# Altium PCB brushed_motor.PcbDoc
Units mm, origin at the board's own origin, x right, y up, seen from the top; angles counter-clockwise.
Board outline 100 x 100 mm, 2 copper layers (Top Layer, Bottom Layer); 34 components, 17 nets, 90 pads, 42 vias.
Unrouted connection lines stored in the file: 41.
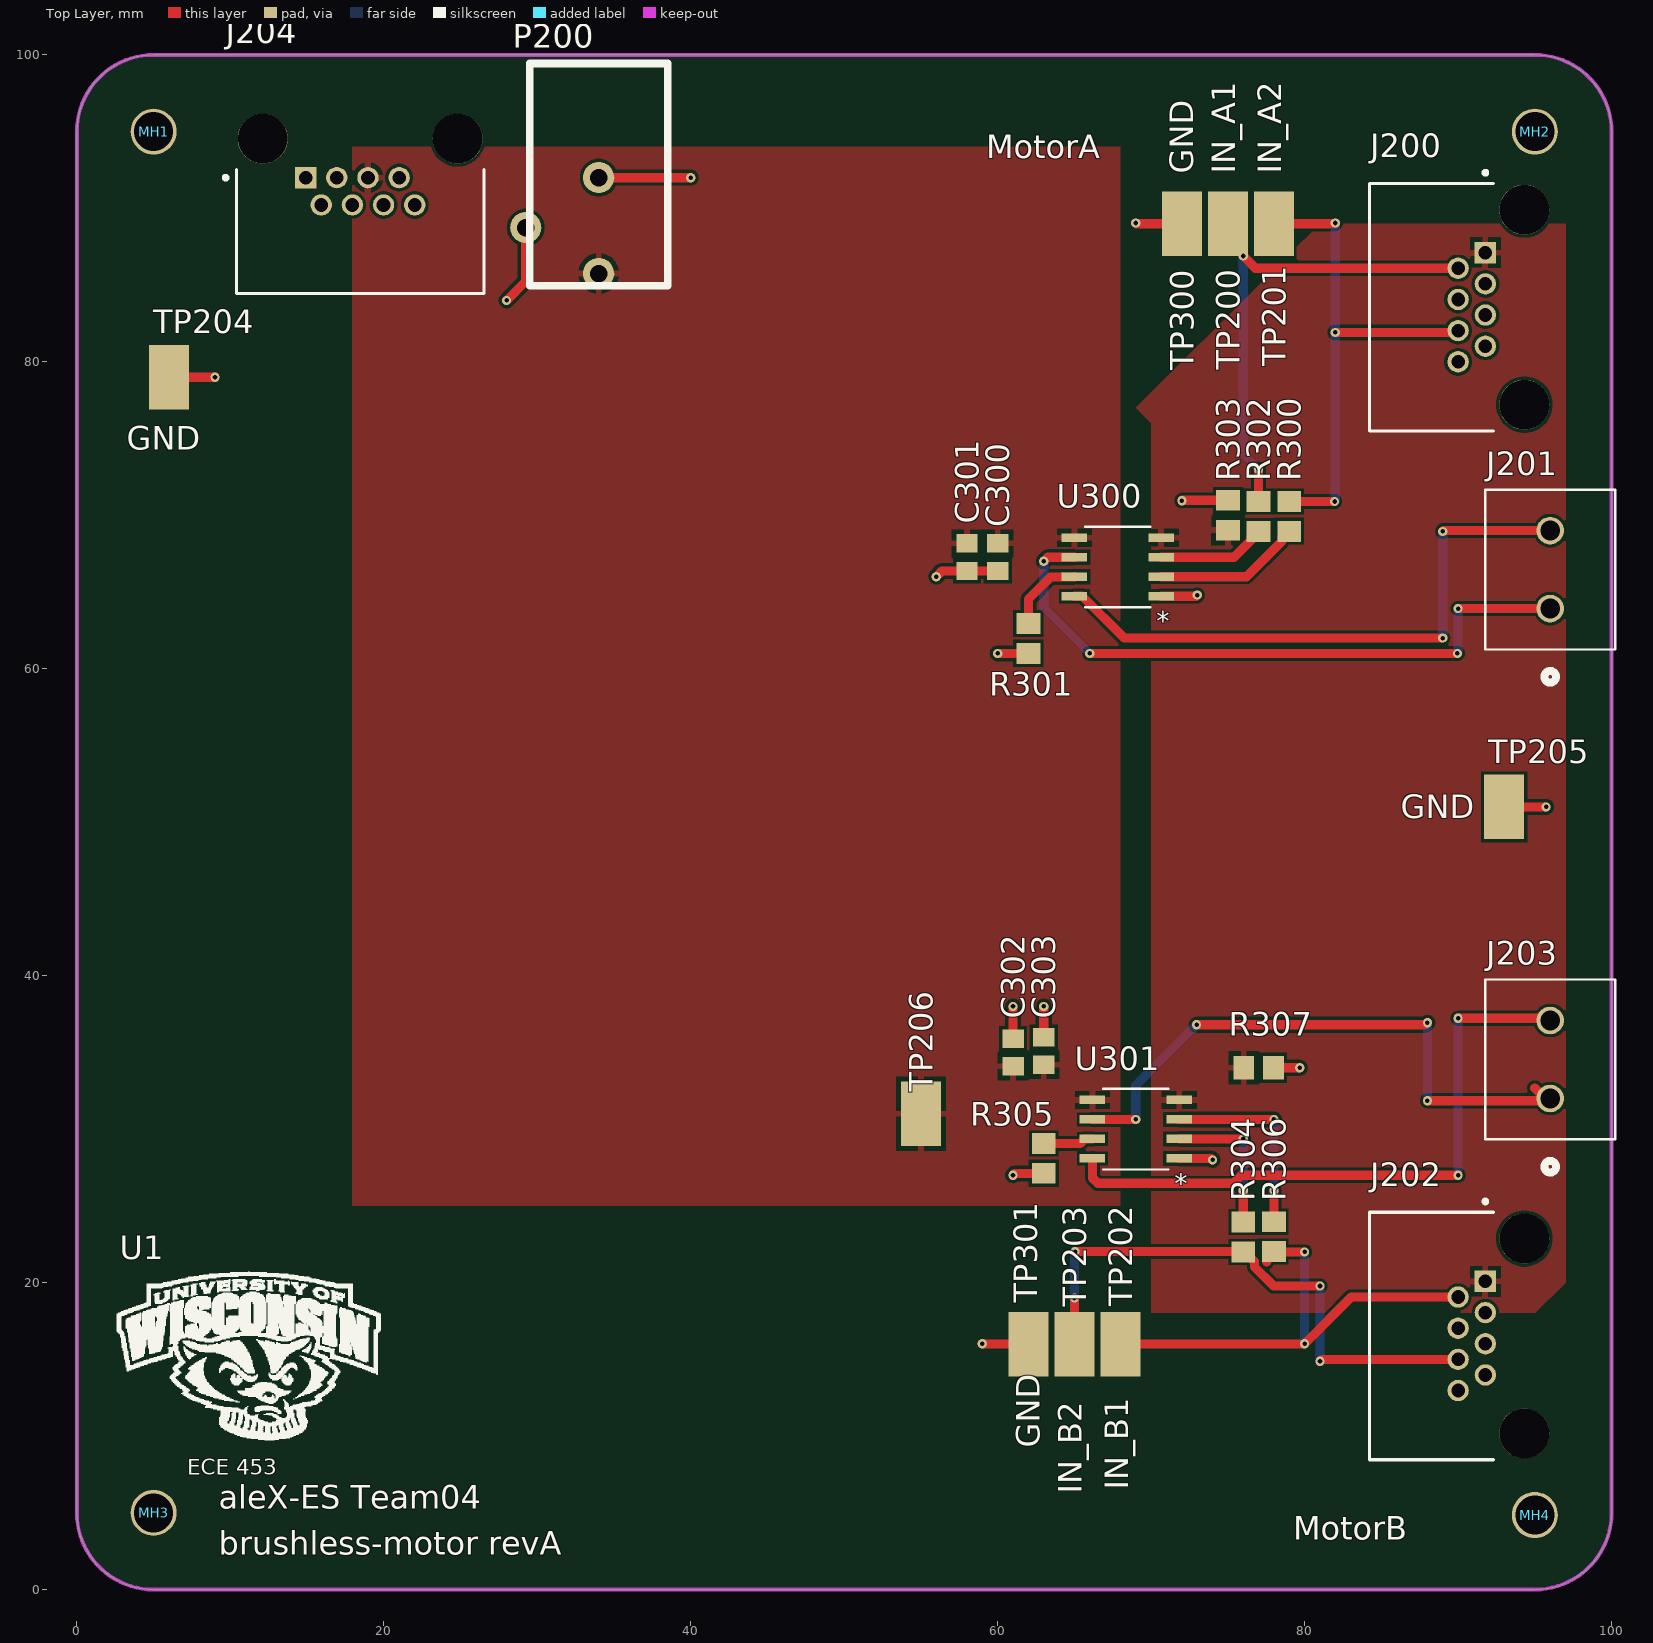
[diagram p0: Top Layer view]
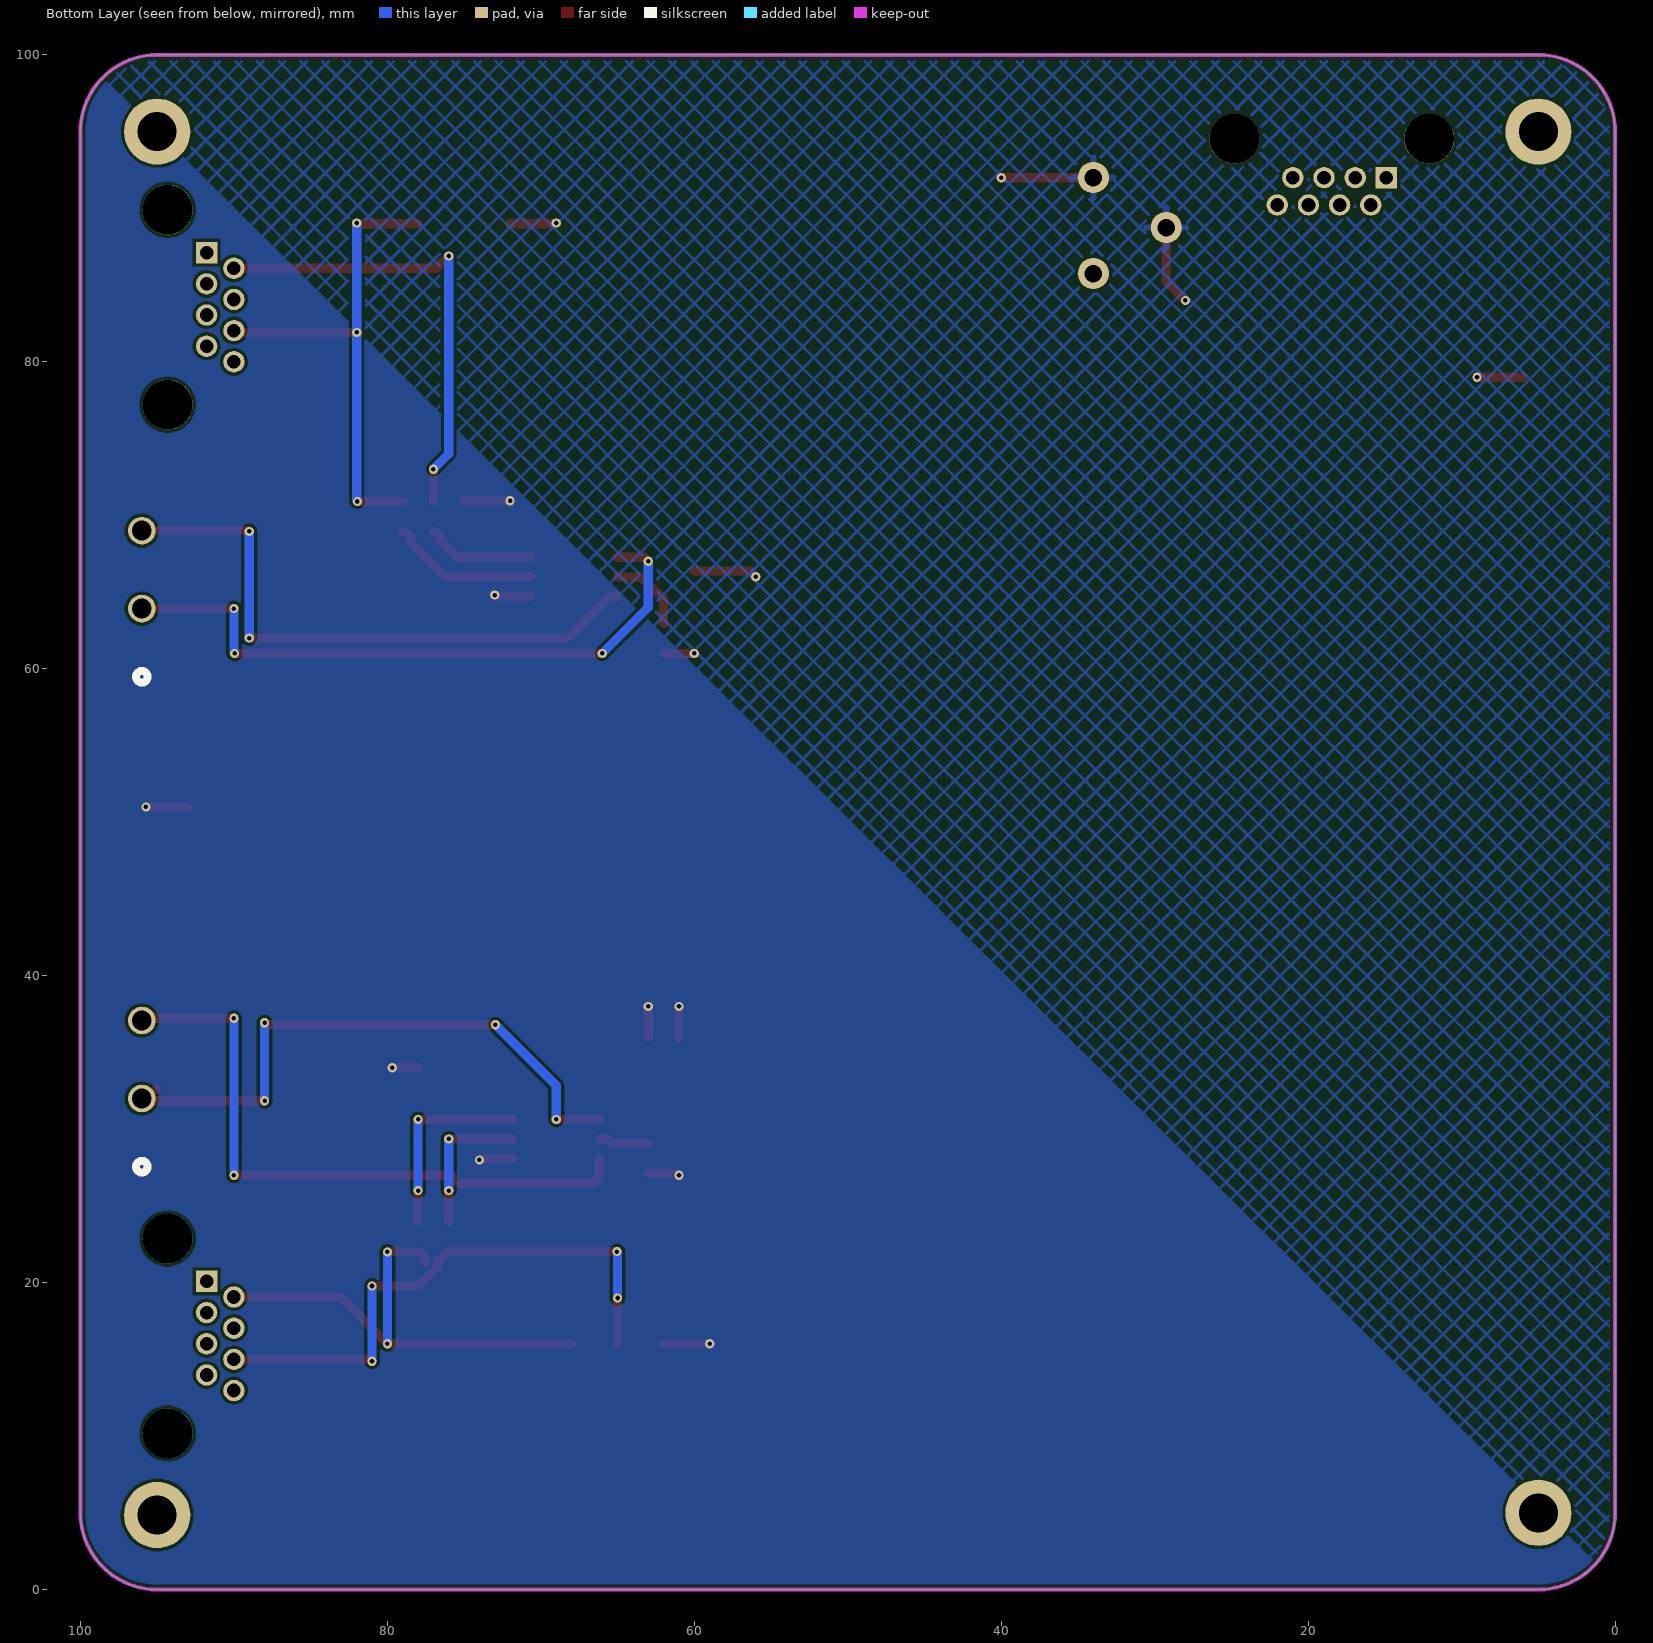
[diagram p1: Bottom Layer view, seen from below]

## Layer stack, top to bottom
Top Solder: solder mask 0.0102, Solder Resist, Dk 3.5
Top Layer: signal copper 0.0356
Dielectric1: dielectric 0.32, FR-4, Dk 4.8
Bottom Layer: signal copper 0.0356
Bottom Solder: solder mask 0.0102, Solder Resist, Dk 3.5

## Board outline
0,5 ccw(c5,5) 5,0 95,0 ccw(c95,5) 100,5 100,95 ccw(c95,95) 95,100 5,100 ccw(c5,95) 0,95

## Design rules (kind name [scope] priority, off if disabled: settings)
Clearance Polygon_Clearance [All vs InPolygon] p1: gap=0.2 ignorepadtopadclearanceinfootprint=FALSE
Clearance [All] p2: gap=0.2 ignorepadtopadclearanceinfootprint=TRUE
ComponentClearance [InComponent('U3')] p1: gap=0 collisioncheckmode=3 verticalgap=0.254 showdistances=FALSE
Height [All] p1: minheight=0 maxheight=75 prefheight=12.7
HoleSize [All] p1: absolutevalues=TRUE maxlimit=6.35 minlimit=0.3 maxpercent=80.000 minpercent=20.000
MinimumAnnularRing [All] p1: minimumring=0.15
MinimumSolderMaskSliver [All] p1: minsoldermaskwidth=0.22
NetAntennae NetAntennae_5.0V [InNet('5.0V')] p1: netantennaetolerance=0
NetAntennae NetAntennae_3.3V [InNet('3.3V')] p2: netantennaetolerance=0
PlaneClearance [All] p1: clearance=0.3
PlaneConnect [All] p1: planeconnectstyle=Relief reliefexpansion=0.3 reliefentries=4 reliefconductorwidth=0.3 reliefairgap=0.3
PolygonConnect ViaConnect [All vs IsVia] p1: connectstyle=Direct reliefconductorwidth=0.381 reliefentries=4 polygonreliefangle="90 Angle" airgapwidth=0.254
PolygonConnect [All] p2: connectstyle=Relief reliefconductorwidth=0.4 reliefentries=4 polygonreliefangle="90 Angle" airgapwidth=0.3
RoutingVias [All] p1: holewidth=0.3 width=0.6 viastyle="Through Hole" minholewidth=0.3 minwidth=0.6 maxholewidth=5 maxwidth=10
SilkToSilkClearance [All] p1: silktosilkclearance=0
SilkToSolderMaskClearance [IsPad] p1: minsilkscreentomaskgap=0 clearancetoexposedcopper=TRUE
SolderMaskExpansion [All] p1: expansion=0.102 istentingtop=FALSE
UnConnectedPin [All] p1:
Width [All] p1: maxlimit=10 minlimit=0.2 preferedwidth=0.6
21 further rules are at their usual default settings.

## Classes and differential pairs
component class 04_Mechanical: MH1 MH2 MH3 MH4 U1

## Components (designator, comment, footprint, x,y, rotation, side; value= is the part's Value field where it differs from the comment)
C300 "C0805C104K5RACTU" CAP_0805 60,67.27 r270 top value=100nF
C301 "C0805C106K8PACTU" CAP_0805 58,67.27 r270 top value=10uF
C302 "C0805C104K5RACTU" CAP_0805 61,35 r90 top value=100nF
C303 "C0805C106K8PACTU" CAP_0805 63,35.1 r90 top value=10uF
J200 "RJHSE-5080" FP-RJHSE-5080-MFG 91.905,83.556 r90 top
J201 "TB006-508-02BE" CONN_TB006-508-02_CUD 96,63.92 r90 top
J202 "RJHSE-5080" FP-RJHSE-5080-MFG 91.905,16.524 r90 top
J203 "TB006-508-02BE" CONN_TB006-508-02_CUD 96,32 r90 top
J204 "RJHSE-5080" FP-RJHSE-5080-MFG 18.46,92.127 r180 top
MH1 "MHOLE_2_55MM" MHOLE_2_55MM 5,95 r0 top locked
MH2 "MHOLE_2_55MM" MHOLE_2_55MM 95,95 r0 top locked
MH3 "MHOLE_2_55MM" MHOLE_2_55MM 5,5 r0 top locked
MH4 "MHOLE_2_55MM" MHOLE_2_55MM 95,4.858 r0 top locked
P200 "PJ-102" PJ-102 34,85.75 r0 top value=CP-102AD
R300 "10K" RESC2013X70X40ML20T20 79,69.925 r270 top value=1K
R301 "1" RESC2013X70X40ML20T20 62,61.975 r90 top value=0.1
R302 "10K" RESC2013X70X40ML20T20 77,69.925 r270 top value=1K
R303 "10K" RESC2013X70X40ML20T20 75,70 r270 top
R304 "10K" RESC2013X70X40ML20T20 76,22.975 r90 top value=1K
R305 "1" RESC2013X70X40ML20T20 63,28.095 r90 top value=0.1
R306 "10K" RESC2013X70X40ML20T20 78,23 r90 top value=1K
R307 "10K" RESC2013X70X40ML20T20 77,34 r180 top
TP200 "IN_A1" TP-SMC-1206 75,89 r90 top
TP201 "IN_A2" TP-SMC-1206 78,89 r90 top
TP202 "IN_A1" TP-SMC-1206 68,16 r90 top
TP203 "IN_A2" TP-SMC-1206 65,16 r90 top
TP204 "GND" TP-SMC-1206 6,79 r90 top
TP205 "GND" TP-SMC-1206 93,51 r90 top
TP206 "VBrush" TP-SMC-1206 55,31 r90 top
TP300 "GND" TP-SMC-1206 72,89 r90 top
TP301 "GND" TP-SMC-1206 62,16 r90 top
U1 "Bucky" WalkingBucky 10,8 r0 top
U300 "DRV8251DDAR" POWERPAD_DDA_TEX-M 67.826,66.635 r180 top
U301 "DRV8251DDAR" POWERPAD_DDA_TEX-M 69,30 r180 top

## Footprints (in the part's own frame and the unit in brackets; to place one, negate y for a bottom-side part, rotate by r counter-clockwise, add the part's x,y. Pads: shape width x height; smd on the part's side, far side on the other; paste and mask are expansions set on the pad)
CAP_0805 [mm]
  rect 1.2x1.4 smd: 1(-0.9,0) 2(0.9,0)
  body extent -1.07,-0.7 1.07,0.7, height 0.7
CONN_TB006-508-02_CUD [mil]
  round 71 / inner round 60 / far side round 71 hole 51 paste-35.5 mask+0: 1(0,0) 2(200,0)
  silkscreen extent -190,-167 305,166
FP-RJHSE-5080-MFG [mm]
  rect 1.39x1.39 hole 0.89 paste-1000 mask+0: 1(3.556,0.127)
  round 1.39 hole 0.89 paste-1000 mask+0: 2(2.54,1.905) 3(1.524,0.127) 4(0.508,1.905) 5(-0.508,0.127) 6(-1.524,1.905) 7(-2.54,0.127) 8(-3.556,1.905)
  round 3.25 hole 3.25 unplated paste-1000 mask+0: ""(-6.35,-2.413) ""(6.35,-2.413)
  silkscreen extent -8.06,-0.41 8.89,7.68, body extent -8.16,-7.78 8.16,7.78, height 0.25
MHOLE_2_55MM [mm]
  round 3 / inner round 4.572 / far side round 4.318 hole 2.55: 1(0,0)
PJ-102 [mil]
  round 80 hole 45: 1(0,0) 2(0,246.05) 3(-187,118.1)
  silkscreen extent -177,-31 177,539, body extent -190,-20 180,547, height 435
POWERPAD_DDA_TEX-M [mil]
  rect 65.5x22 smd paste+0 mask+0: 1(-111.25,75) 2(-111.25,25) 3(-111.25,-25) 4(-111.25,-75) 5(111.25,-75) 6(111.25,-25) 7(111.25,25) 8(111.25,75)
  silkscreen extent -84,-104 84,104, body extent -122,-99 122,99, height 67
RESC2013X70X40ML20T20 [mm]
  rect 1.35x1.55 smd: 1(-0.975,0) 2(0.975,0)
  body extent -1.1,-0.72 1.1,0.72, height 0.7
TP-SMC-1206 [mm]
  rect 4.2x2.6 smd mask+0: 1(0,0)
  body extent -1.57,-0.79 1.63,0.81, height 1.22
WalkingBucky [mm]
  silkscreen extent -7.42,1.75 9.8,12.73

## Part data
C300 C302: library part CMP-2007-00279-2, "CAP CER 0.1UF 50V X7R 0805", Case Code (Imperial)=0805, Case Code (Metric)=2012, Dielectric=X7R, Manufacturer=KEMET, Max Operating Temperature=125°C, Min Operating Temperature=-55°C, Package Quantity=4000, Supplier Part Number=19C6015, Tolerance=10%, Voltage=500V, Voltage Rating=50V, Case/Package=0805, Category="Ceramic Capacitors", ComponentLink1Description=https://datasheet.ciiva.com/32431/slceramic-chip-condensers-e-32431755.pdf?src-supplier=Distrelec, ComponentLink1URL=https://datasheet.ciiva.com/32431/slceramic-chip-condensers-e-32431755.pdf?src-supplier=Distrelec, ComponentLink2Description=Datasheet, ComponentLink2URL=https://content.kemet.com/datasheets/KEM_C1003_C0G_SMD.pdf, ComponentLink3Description=https://datasheet.ciiva.com/28682/1851736-28682232.pdf?src-supplier=Element14, ComponentLink3URL=https://datasheet.ciiva.com/28682/1851736-28682232.pdf?src-supplier=Element14, Construction=Flat, Depth=1.25mm, Height=0.9mm, Lead Pitch=0.75mm, Length=2mm, Manufacturer Part Number=C0805C104K5RACTU, Mounting Technology="Surface Mount,PCB", Packaging="Tape and Reel", Pins=2, Pricing="1=0.024, 25=0.024, 50=0.024, 100=0.024, 250=0.024, 500=0.024, 1000=0.024 (USD)", Radiation Hardening=No, Reach SVHC Compliant=No, RoHS=Yes, RoHS Compliant=Yes, Series="SMD Comm X7R", Stock=3382390, Supplier=Newark, Termination=SMD/SMT, Voltage Rating (DC)=50V, Width=1.2mm
C301 C303: library part CMP-2007-03243-2, "CAP CER 10UF 10V X5R 0805", Case Code (Imperial)=0805, Case Code (Metric)=2012, Dielectric=X5R, Dielectric Material=Ceramic, Manufacturer=KEMET, Max Operating Temperature=85°C, Min Operating Temperature=-55°C, Package Quantity=1, Supplier Part Number=70K9138, Tolerance=10%, Voltage=10V, Case/Package=0805, Category="Ceramic Capacitors", ComponentLink1Description=https://datasheet.ciiva.com/7842/1732709-7842198.pdf?src-supplier=Element14, ComponentLink1URL=https://datasheet.ciiva.com/7842/1732709-7842198.pdf?src-supplier=Element14, Construction=Flat, Contact Plating=Tin,Matte, Depth=1.25mm, Dissipation Factor=10%, Height=1.25mm, Length=2mm, Manufacturer Part Number=C0805C106K8PACTU, Mounting Technology="Surface Mount", Packaging="Tape and Reel", Pins=2, Pricing="1=0.141, 25=0.141, 50=0.141, 100=0.141, 250=0.141, 500=0.141, 1000=0.141 (USD)", Radiation Hardening=No, Reach SVHC Compliant=No, RoHS=Yes, RoHS Compliant=Yes, Series=C, Stock=186414, Supplier=Newark, Termination=SMD/SMT, Thickness=0.055inch, Voltage Rating=10V, Voltage Rating (DC)=10V, Width=0.049inch
J200 J202 J204: library part CMP-02366-000003-1, "CONN MOD JACK 8P8C R/A UNSHLD", Contact Resistance=20mR, Current Rating=1.5A, Manufacturer=Amphenol, Max Voltage Rating (AC)=125V, Package=CONN_MOD_JACK, Supplier Part Number=28T0105, Temperature="-55°C to +85°C", Temperature Range High=+85°C, Temperature Range Low=-55°C, Automotive=No, Category=Conn, ComponentLink1Description=https://datasheet.ciiva.com/7629/1682821-7629402.pdf?src-supplier=Element14, ComponentLink1URL=https://datasheet.ciiva.com/7629/1682821-7629402.pdf?src-supplier=Element14, ComponentLink2Description=Datasheet, ComponentLink2URL=https://cdn.amphenol-icc.com/media/wysiwyg/files/documentation/datasheet/inputoutput/io-modjack-rjhse.pdf, ComponentLink3Description=https://datasheet.ciiva.com/685/rjhse5080-685586.pdf?src-supplier=Digi-Key, ComponentLink3URL=https://datasheet.ciiva.com/685/rjhse5080-685586.pdf?src-supplier=Digi-Key, ComponentLink4Description=https://datasheet.ciiva.com/1432/1693748-1432448.pdf?src-supplier=Element14, ComponentLink4URL=https://datasheet.ciiva.com/1432/1693748-1432448.pdf?src-supplier=Element14, ComponentLink5Description=https://datasheet.ciiva.com/15171/getdatasheetpartid-643190-15171163.pdf?src-supplier=Verical, ComponentLink5URL=https://datasheet.ciiva.com/15171/getdatasheetpartid-643190-15171163.pdf?src-supplier=Verical, Conn Gender=Female, Conn Orientation="Right Angle", Connector Type=RJ45, Contact Material=Gold,Nickel, Contact Plating=Gold, Depth=14.99mm, Device Class L1=Connectors, Device Class L2="Modular / Ethernet Connectors", Device Class L3=unset, Digikey Description="CONN MOD JACK 8P8C R/A UNSHLD", Footprint Url=https://cdn.amphenol-icc.com/media/wysiwyg/files/drawing/rjhse5080.pdf?__cf_chl_jschl_tk__=e349db0bbbb6188a39347cd5e541b92fa02c9719-1587748343-0-AW7tChdeHzRPLX9gSWj7WrKaXQoY9BsmT9Ek0h-T62M9y3Rs9iypFcOtkzb-6sGYQEjFE-jcoNciDETCOZrh1rYyOesac5SvYLoLwHIsHvF4AKBlx-MXmfZUVk9OTTJLqyQq2qMm0PFRLJpNcK0nrKResqOniRSYixG2sPTmOPraH-ULJFBDL602CHqcI9KKBgTq90Jh1OL2Td4moJ99rFsJRJ1Tk_uoxGe8ublcP_ARu-uLpWcQrBcwOcHDTAwL29DAwVaqcH7ta8Ks7WMlHmVl_pILeEDwT0bE9vu5Pa5S3PtNRF1leuFkgi_FMbUxTDulc5xzbXSfng8srUIV1lWXny5nx1fZJEUa_w97yKjffzBMxiWLWVN-V7-uqAaPbyv_m-wRyw5O25OZNyJOeGU, Gender=Female, Height=0.535inch, Is Female=yes, Lead Free=Yes, Length=15.75mm, Manufacturer Part Number=RJHSE-5080, Max Current Rating=1.5A, Mounting Technology="Through Hole,Panel", Mouser Description="Modular Connectors / Ethernet Connectors R/A RJ45 NONSHIELDED 8 CONT NO LEDS", Number of Contacts=8, Number of Ports=1, Number of Positions=8, Number of Positions Loaded=8, Octopart=https://octopart.com/rjhse-5080-amphenol-45060, Orientation="Right Angle", Packaging=Rail/Tube, Pitch=1.02mm, Pricing="1=0.966, 10=0.854, 25=0.808, 50=0.777, 100=0.748, 250=0.688, 500=0.627, 1000=0.568 (USD)", Radiation Hardening=No, Reach SVHC Compliant=Unknown, RoHS=TRUE, RoHS Compliant=Yes, Stock=8640, Supplier=Newark, Termination=Solder, Voltage Rating=125V, Voltage Rating (DC)=125V
J201 J203: "No Description Available", Mfr_Name="CUI Devices", Copyright="Copyright (C) 2023 Ultra Librarian. All rights reserved.", Manufacturer_Part_Number=TB006-508-02BE, RefDes=RefDes, Type=DEV
MH1 MH2 MH3 MH4: "Mounting Holde", Manufacturer Part Number="UW MTHOLE"
P200: library part "CONN JACK PWR W/SW", "CONN PWR JACK 2.1X5.5MM HIGH CUR", Color=Black, Current Rating=5A, Manufacturer="CUI Inc", Manufacturer Part Number=PJ-102AH, Operating Temperature="-25°C ~ 85°C", Supplier Part Number=CP-102AH-ND, Voltage - Rated=24VDC, Connector Type=Jack, Contact Material=Copper, Contact Material - Plating=Nickel, Gender=Male, Housing Color=Black, Housing Material=Thermoplastic, Internal Switch(s)="Single Switch, Normally Closed", Mounting Type="Through Hole, Right Angle", Number of Positions/Contacts="2 Conductors, 3 Contacts", Plug/Mating Plug Diameter="2.1mm ID, 5.5mm OD", Shielding=Unshielded, Supplier=Digi-Key, Termination=Solder
R300 R302 R304 R306: library part Res3_1, "Res Thick Film 0805 1K Ohm 1% 0.125W(1/8W) ±100ppm/C Pad SMD Automotive T/R", Case Code (Imperial)=0805, Case Code (Metric)=2012, Manufacturer="Stackpole Electronics", Manufacturer Part Number=RMCF0805FT1K00, Max Operating Temperature=155°C, Max Power Dissipation=125mW, Min Operating Temperature=-55°C, Resistor Type="Thick Film", Supplier Part Number 1=RMCF0805FT1K00CT-ND, Temperature Coefficient=100ppm/°C, Tolerance=1%, Case/Package=0805, Category="Chip SMD Resistors", ComponentLink1Description=https://datasheet.ciiva.com/15193/getdatasheetpartid-360136-15193546.pdf?src-supplier=Verical, ComponentLink1URL=https://datasheet.ciiva.com/15193/getdatasheetpartid-360136-15193546.pdf?src-supplier=Verical, Construction=Rectangular, Contact Plating=Tin,Matte, Depth=1.25mm, Features="Automotive AEC-Q200", Height=0.026inch, Lead Free="Lead Free", Length=2mm, Military Standard=Not, Mounting Technology="Surface Mount", Number of Terminations=2, Packaging="Tape and Reel", Power Rating=125mW, Pricing 1="1=0.10000, 10=0.02400, 100=0.00970, 1000=0.00437, 2500=0.00379 (USD)", Radiation Hardening=No, RoHS=Yes, RoHS Compliant=Yes, Series=RMCF, Stock 1=2773085, Supplier 1=Digi-Key, Width=0.049inch
R301 R305: library part Res3_2, "Res 0.1 Ohm 1% 1W 1206", Manufacturer=Cyntec, Manufacturer Part Number=SCRR1206S1-R100F, Supplier Part Number 1=2037-SCRR1206S1-R100FCT-ND, Category="Chip SMD Resistors", Pricing 1="1=0.61000, 10=0.45100, 25=0.36600, 50=0.31820, 100=0.26250, 250=0.22800, 500=0.18558, 1000=0.14720 (USD)", RoHS=Yes, Stock 1=10585, Supplier 1=Digi-Key
R303 R307: library part Res3, "Res Thick Film 0805 10K Ohm 1% 0.125W ±100ppm/°C Molded SMD Paper T/R", Case Code (Imperial)=0805, Case Code (Metric)=2012, Manufacturer="Stackpole Electronics", Manufacturer Part Number=RMCF0805FT10K0, Max Operating Temperature=155°C, Max Power Dissipation=125mW, Min Operating Temperature=-55°C, Resistor Type="Thick Film", Supplier Part Number 1=RMCF0805FT10K0CT-ND, Temperature Coefficient=100ppm/°C, Tolerance=1%, Case/Package=0805, Category="Chip SMD Resistors", ComponentLink1Description=https://datasheet.ciiva.com/15193/getdatasheetpartid-362046-15193525.pdf?src-supplier=Verical, ComponentLink1URL=https://datasheet.ciiva.com/15193/getdatasheetpartid-362046-15193525.pdf?src-supplier=Verical, Construction=Rectangular, Contact Plating=Tin,Matte, Depth=1.25mm, Features="Automotive AEC-Q200", Height=0.026inch, Lead Free="Lead Free", Length=2mm, Military Standard=Not, Mounting Technology="Surface Mount", Number of Terminations=2, Packaging="Tape and Reel", Power Rating=125mW, Pricing 1="1=0.10000, 10=0.02400, 100=0.00970, 1000=0.00437, 2500=0.00379 (USD)", Radiation Hardening=No, RoHS=Yes, RoHS Compliant=Yes, Series=RMCF, Stock 1=3732463, Supplier 1=Digi-Key, Width=0.049inch
TP200 TP201 TP202 TP203 TP204 TP205 TP206 TP300 TP301: library part TP_1206, "Test Point SMD 1206", Case Size=1206, Manufacturer="TE Connectivity (Tyco Electronics)", Manufacturer Part Number=1625854-1, Operating Temperature="-55 to 125 C", Power Rating=N/R, Resistance Value="0 Ohm", Supplier Part Number=A106143CT-ND, ComponentLink1Description=https://datasheet.ciiva.com/6439/eng-ds-1773266-a-6439169.pdf, ComponentLink1URL=https://datasheet.ciiva.com/6439/eng-ds-1773266-a-6439169.pdf, ComponentLink2Description=https://datasheet.ciiva.com/30136/1773266-a-30136341.pdf, ComponentLink2URL=https://datasheet.ciiva.com/30136/1773266-a-30136341.pdf, ComponentLink3Description=https://datasheet.ciiva.com/6439/eng-ds-1773266-a-6439080.pdf, ComponentLink3URL=https://datasheet.ciiva.com/6439/eng-ds-1773266-a-6439080.pdf, ComponentLink4Description=https://datasheet.ciiva.com/6439/eng-ds-1773266-a-6439081.pdf, ComponentLink4URL=https://datasheet.ciiva.com/6439/eng-ds-1773266-a-6439081.pdf, ComponentLink5Description=https://datasheet.ciiva.com/6439/eng-ds-1773266-a-6439083.pdf, ComponentLink5URL=https://datasheet.ciiva.com/6439/eng-ds-1773266-a-6439083.pdf, Dimension="3.2 x 1.6 x 1.25mm", Family=RC, Mounting="Surface Mount", Packaging="Tape and Reel", Part No=1625854-1, Pricing 1="1=0.28, 10=0.261, 25=0.224, 50=0.1902, 100=0.1828, 250=0.1641, 500=0.1567, 1000=0.1306 (USD)", RoHS=Yes, Stock 1=31937, Supplier=Digi-Key, Temperature Coefficient=N/R, Terminal Pitch=N/R, Termination Style=N/R, Tolerance=N/R
U1: "Bucky Badger Image", Manufacturer Part Number="UW Bucky"
U300 U301: "No Description Available", Mfr_Name="Texas Instruments", Copyright="Copyright (C) 2023 Ultra Librarian. All rights reserved.", Manufacturer_Part_Number=DRV8251DDAR, RefDes=RefDes, Type=DEV

## Via types
v1: diameter 0.6, hole 0.3, Top Layer to Bottom Layer, 42 vias

## Nets (pads, with @x,y where several pads share a name; then routed paths per layer and width w, separated by ;. In a path a pad name is that pad's centre, name@x,y a point inside that pad or via, vN(x,y) a via of type N, cw(c..) or ccw(c..) an arc to the next point about the centre after c; other vN are vias at no path point)
3.3V: J200.1 J202.1 R303.2 R307.2 U300.4 U301.4
GND: C300.2 C301.2 C302.2 C303.2 P200.2 P200.3 R301.1 R303.1 R305.1 R307.1 TP204.1 TP205.1 TP300.1 TP301.1 U300.1 U301.1 | length 44.6
  Top Layer w0.6: TP204.1 v1(9,79) ; v1(28,84) 29.25,85.25 P200.3 ; P200.2 v1(40,92) ; v1(56,66) 56.37,66.37 C301.2 C300.2 ; v1(59,16.016) 59.016,16 TP301.1 ; v1(60,61) R301.1 ; v1(61,27) 61.12,27.12 R305.1 ; C302.2 v1(61,38) ; C303.2 v1(63,38) ; v1(69,89.042) 69.042,89 TP300.1 ; U300.1 72.928,64.73 v1(73,64.802) ; U301.1 73.905,28.095 v1(74,28) ; v1(72,70.949) 72.026,70.975 R303.1 ; R307.1 v1(79.681,34) ; TP205.1 v1(95.736,51)
IN_A1: J200.2 R302.1 TP200.1 | length 30.7
  Top Layer w0.6: v1(76,86.893) 76.797,86.096 J200.2 ; R302.1 v1(77,73)
  Bottom Layer w0.6: v1(76,86.893) 76,74 v1(77,73)
IN_A2: J200.6 R300.1 TP201.1 | length 33.2
  Top Layer w0.6: TP201.1 81.958,89 v1(82,89.042) ; R300.1 v1(81.951,70.9) ; v1(82,81.914) 89.882,81.914 J200.6
  Bottom Layer w0.6: v1(81.951,70.9) 82,70.949 v1(82,81.914) v1(82,89.042)
IN_B1: J202.2 R306.1 TP202.1 | length 32.2
  Top Layer w0.6: TP202.1 79.984,16 v1(80,16.016) 83.048,19.064 J202.2 ; R306.1@77.525,21.368 77.525,21.65 77.9,22.025 R306.1 78.025,22 v1(80,22)
  Bottom Layer w0.6: v1(80,16.016) v1(80,22)
IN_B2: J202.6 R304.1 TP203.1 | length 37.1
  Top Layer w0.6: TP203.1 v1(65,19) ; v1(65.042,22.025) 76.075,22.025 76.725,21.375 76.725,21.037 77.981,19.78 v1(81,19.78) ; v1(81,14.882) 81.118,15 J202.6
  Bottom Layer w0.6: v1(65,19) 65,21.983 v1(65.042,22.025) ; v1(81,14.882) v1(81,19.78)
NetR300_2: R300.2 U300.2 | length 9.7
  Top Layer w0.6: U300.2 76.207,66 78.525,68.318 78.525,68.575 78.9,68.95 R300.2
NetR301_2: R301.2 U300.7 | length 5.2
  Top Layer w0.6: R301.2 62,64.525 63.454,65.979 64.979,65.979 U300.7
NetR302_2: R302.2 U300.3 | length 7.2
  Top Layer w0.6: U300.3 75.402,67.27 76.525,68.393 76.525,68.575 76.9,68.95 R302.2
NetR304_2: R304.2 U301.2 | length 9.6
  Top Layer w0.6: U301.2 v1(76,29.365) ; R304.2 v1(76,26)
  Bottom Layer w0.6: v1(76,26) v1(76,29.365)
NetR305_2: R305.2 U301.7 | length 3.3
  Top Layer w0.6: R305.2 65.368,29.07 65.663,29.365 U301.7
NetR306_2: R306.2 U301.3 | length 12.8
  Top Layer w0.6: U301.3 v1(78,30.635) ; R306.2 v1(78,26)
  Bottom Layer w0.6: v1(78,26) v1(78,30.635)
Out_A1: J201.1 U300.6 | length 42.2
  Top Layer w0.6: v1(63,67) 63.268,67.268 64.998,67.268 U300.6 ; v1(66,61) v1(89.951,61) ; v1(90,63.92) J201.1
  Bottom Layer w0.6: v1(63,67) 63,64 v1(66,61) ; v1(89.951,61) 90,61.049 v1(90,63.92)
Out_A2: J201.2 U300.8 | length 39.1
  Top Layer w0.6: U300.8 65.511,64.73 68.241,62 v1(89,62) ; v1(89,68.95) 89.05,69 J201.2
  Bottom Layer w0.6: v1(89,62) v1(89,68.95)
Out_B1: J203.1 U301.6 | length 40.2
  Top Layer w0.6: U301.6 v1(69,30.635) ; v1(72.958,36.8) 87.865,36.8 v1(88,36.935) ; v1(88,31.855) 95.855,31.855 J203.1 95.674,32 94.99,32.684
  Bottom Layer w0.6: v1(69,30.635) 69,32.842 v1(72.958,36.8) ; v1(88,31.855) v1(88,36.935)
Out_B2: J203.2 U301.8 | length 41.7
  Top Layer w0.6: U301.8 66.174,26.822 66.526,26.471 75.34,26.471 75.869,27 v1(90,27) ; v1(90,37.225) 95.855,37.225 J203.2
  Bottom Layer w0.6: v1(90,27) v1(90,37.225)
VBrush: C300.1 C301.1 C302.1 C303.1 J204.5 P200.1 TP206.1 U300.5 U301.5
pads on no net: J200. J200.3 J200.4 J200.5 J200.7 J200.8 J202. J202.3 J202.4 J202.5 J202.7 J202.8 J204. J204.1 J204.2 J204.3 J204.4 J204.6 J204.7 J204.8 MH1.1 MH2.1 MH3.1 MH4.1

## Polygon pours and split planes (outlines as drawn)
GND on Bottom Layer "GND" (hatched 45Degree grid 1 track 0.2, remove dead copper, pour order 9): 0,100 0,0 100,0 100,100
GND on Bottom Layer "GND_L02_P005" (solid, remove dead copper, pour order 5): -0.5,0 100,0 100,100
3.3V on Top Layer "3.3V" (solid, remove dead copper, pour order 8): 97,89 81,89 69,77 70,76 70,18.048 94.952,18.048 95,18 97,20
VBrush on Top Layer "VBRUSH_L01_P007" (solid, remove dead copper, pour order 7): 17.952,94 17.952,92 17.952,25 68,25 68,31 68,94 46,94

## Keep-outs
Keep-Out Layer:
  the board outline again, w0.254

## Silkscreen, mask and mechanical layers (free items; w line width, h text height)
Top Overlay:
  text "MotorA" at 59.254,93.254 h1.52
  text "GND" at 72.746,92.254 h1.52 r90
  text "IN_A1" at 75.492,92.254 h1.52 r90
  text "IN_A2" at 78.492,92.254 h1.52 r90
  text "GND" at 3.254,74.254 h1.52
  text "GND" at 86.254,50.254 h1.52
  text "GND" at 62.746,9.254 h1.52 r90
  text "IN_B1" at 68.492,6.508 h1.52 r90
  text "IN_B2" at 65.492,6.254 h1.52 r90
  text "aleX-ES Team04" at 9.254,5.254 h1.52
  text "MotorB" at 79.254,3.254 h1.52
  text "brushless-motor revA" at 9.254,2.254 h1.52
Mechanical 2:
  lines w0.254: 5,0 cw(c5,5) 0,5 0,95 cw(c5,95) 5,100 95,100 cw(c95,95) 100,95 100,5 cw(c95,5) 95,0 5,0 ; 5,0 5,0

## Text inside footprints (layer, text, board x,y; h text height)
U1: Top Overlay "ECE 453" at 7.206,7.492 h1.02
U300: Top Overlay "*" at 71.223,64.298 h1.27 r180; Mechanical 13 "*" at 69.756,65.479 h1.27 r180
U301: Top Overlay "*" at 72.397,27.663 h1.27 r180; Mechanical 13 "*" at 70.93,28.844 h1.27 r180